# Altium PCB DebugSwitch.PcbDoc
Units mm, origin at the board's own origin, x right, y up, seen from the top; angles counter-clockwise.
Board outline 100 x 50 mm, 2 copper layers (Top Layer, Bottom Layer), stack 1.571 mm thick; 25 components, 37 nets, 149 pads, 345 vias.
Unrouted connection lines stored in the file: 12.
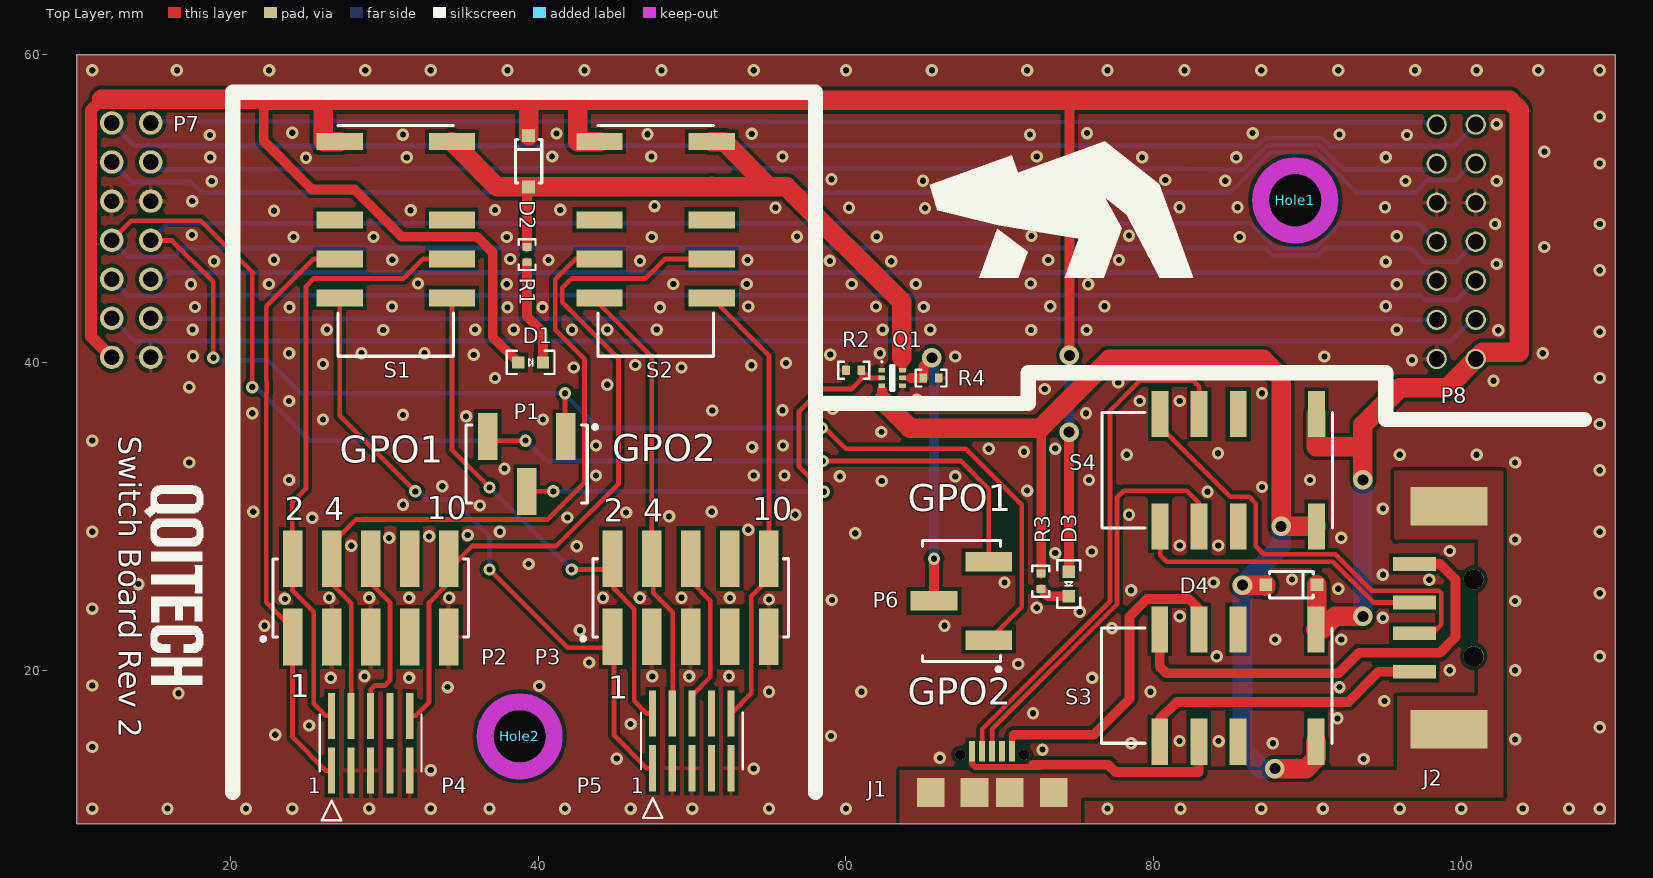
[diagram p0: Top Layer view]
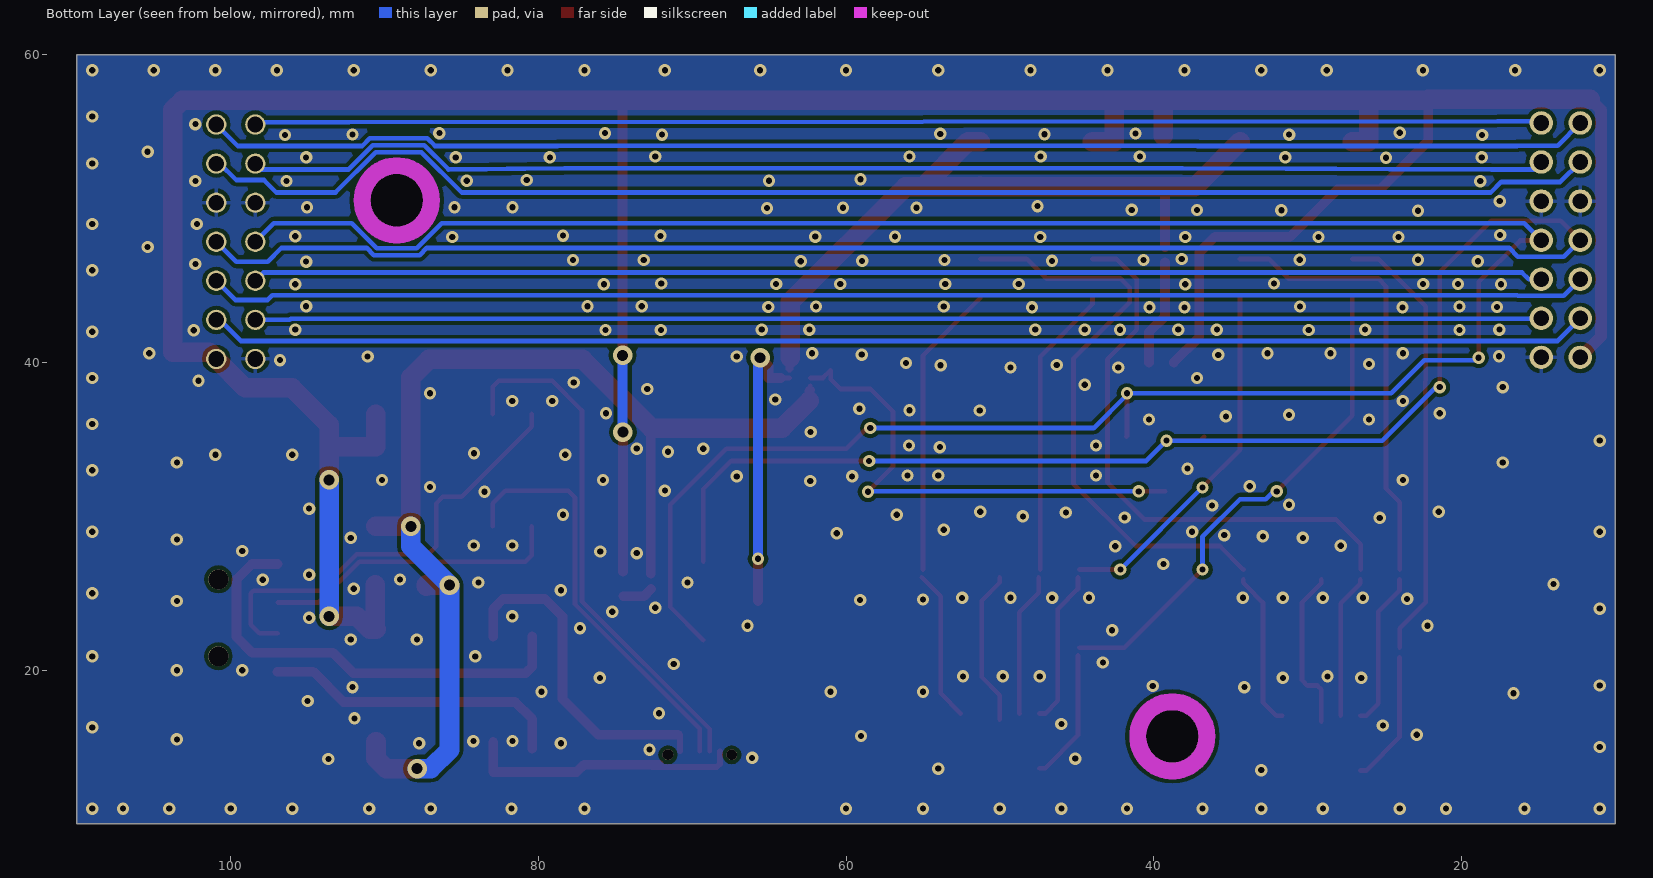
[diagram p1: Bottom Layer view, seen from below]
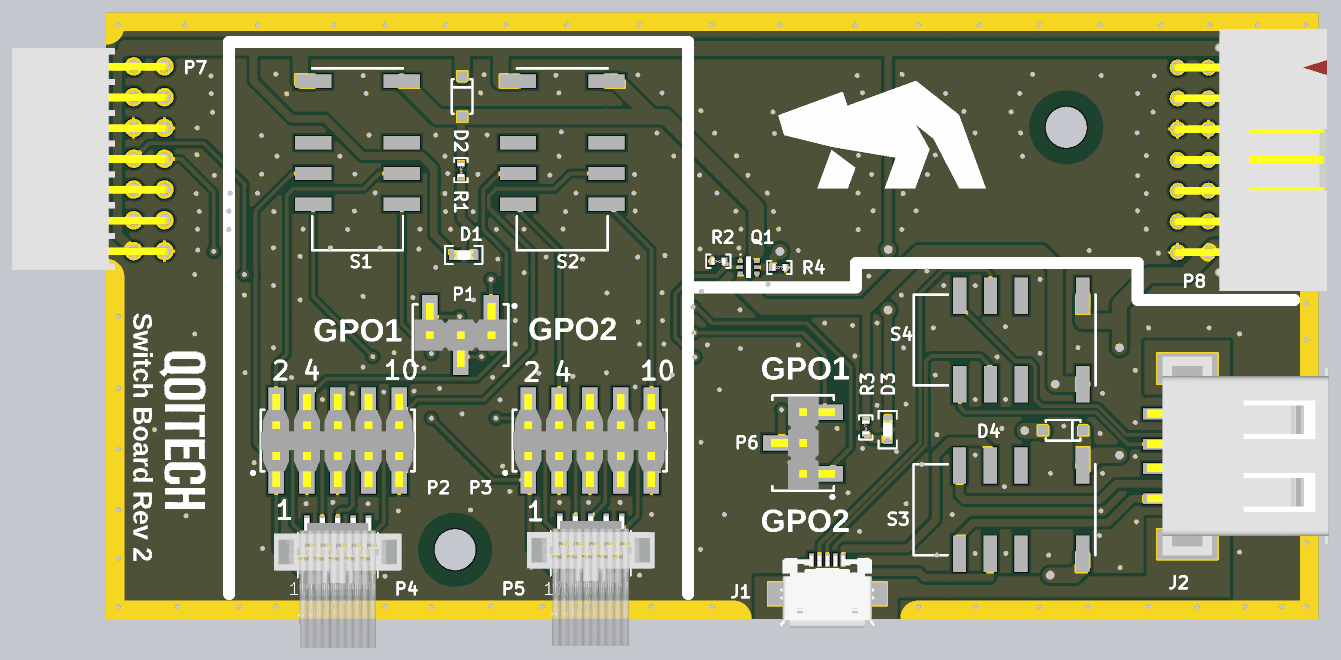
[diagram p2: 3D render of the assembled board from above, using the file's embedded part models]

## Layer stack, top to bottom
Top Solder: solder mask 0.0102, Solder Resist, Dk 3.5
Top Layer: signal copper 0.0356
Dielectric 1: dielectric 1.5, FR-4, Dk 4.8
Bottom Layer: signal copper 0.0356
Bottom Solder: solder mask 0.0102, Solder Resist, Dk 3.5

## Board outline
10,10 110,10 110,60 10,60

## Design rules (kind name [scope] priority, off if disabled: settings)
Clearance Clearance_2 [InNamedPolygon('Top Layer-USB_shield') vs InNet('USB_shield')] p1: gap=0 ignorepadtopadclearanceinfootprint=FALSE
Clearance Clearance_1 [InPolygon] p2: gap=0.254 ignorepadtopadclearanceinfootprint=FALSE except(0: Arc-Hole Track-Hole SMDPad-Hole THPad-Hole Via-Hole Fill-Hole Poly-Hole Region-Hole Text-Hole)
Clearance [All] p3: gap=0.152 ignorepadtopadclearanceinfootprint=FALSE except(0: Arc-Hole Track-Hole SMDPad-Hole THPad-Hole Via-Hole Fill-Hole Poly-Hole Region-Hole Text-Hole)
HoleSize [All] p1: absolutevalues=TRUE maxlimit=5.08 minlimit=0.025 maxpercent=80.000 minpercent=20.000
PolygonConnect PolygonConnect_1 [All vs IsNamedPolygon('Top Layer-USB_shield')] p1: connectstyle=Direct reliefconductorwidth=0.254 reliefentries=4 polygonreliefangle="90 Angle" airgapwidth=0.254
PolygonConnect [All] p2: thpad.connectstyle=Relief thpad.reliefconductorwidth=0.254 thpad.reliefentries=4 thpad.polygonreliefangle="90 Angle" thpad.airgapwidth=0.254 smdpad.connectstyle=Relief smdpad.reliefconductorwidth=0.254 smdpad.reliefentries=4 smdpad.polygonreliefangle="90 Angle" smdpad.airgapwidth=0.254 via.connectstyle=Direct via.reliefconductorwidth=0.254 via.reliefentries=4 via.polygonreliefangle="90 Angle" via.airgapwidth=0.254
RoutingVias [All] p1: holewidth=0.711 width=1.27 viastyle="Through Hole" minholewidth=0.3 minwidth=0.605 maxholewidth=0.711 maxwidth=1.27
SolderMaskExpansion [All] p1: expansion=0.102
Width [All] p1: maxlimit=1.27 minlimit=0.152 preferedwidth=0.305 minimp=50.000000 maximp=50.000000 favimp=50.000000
29 further rules are at their usual default settings.

## Components (designator, comment, footprint, x,y, rotation, side; value= is the part's Value field where it differs from the comment)
D1 "LED_GREEN" LED_0603 39.497,40.005 r180 top
D2 "Diode" SOD-123 39.37,53.086 r90 top
D3 "LED_GREEN" LED_0603 74.475,25.605 r90 top
D4 "Diode" SOD-123 88.951,25.552 r0 top
Hole1 "M3x0.5" M3x0.5 89.205,50.546 r0 top
Hole2 "M3x0.5" M3x0.5 38.786,15.697 r0 top
J1 "USB" USB_microB 69.5,13 r0 top
J2 "USB_A" USB-A-S-F-W-SM2 99.2,23.4 r90 top
P1 "3x1pin header" TSM-103-01-T-SV 39.243,33.401 r180 top
P2 "5x2pin header" TSM-105-01-L-DV 29.1,24.7 r0 top
P3 "5x2pin header" TSM-105-01-L-DV 49.9,24.705 r0 top
P4 "5x2pin header" FTSH-105-01-F-DV 29.1,15.25 r0 top
P5 "5x2pin header" FTSH-105-01-F-DV 49.975,15.4 r0 top
P6 "3x1pin header" TSM-103-01-T-SV 67.5,24.5 r90 top
P7 "7x2pin header" SSQ-107-02-T-D-RA 13.538,47.955 r270 top
P8 "7x2pin header" TSS-107-04-L-D-RA 99.67,47.854 r90 top
Q1 "NTZD3154NT1G" SOT-563-6 63,39 r0 top
R1 "RES_0402" RES_0402 39.268,47.015 r90 top value=10k
R2 "RES_0402" RES_0402 60.5,39.5 r0 top value=10k
R3 "RES_0402" RES_0402 72.669,25.781 r90 top value=10k
R4 "RES_0402" RES_0402 65.532,38.989 r180 top value=10k
S1 "Relay_DPDT" EE2-5NU 30.734,49.276 r270 top
S2 "Relay_DPDT" EE2-5NU 47.625,49.276 r270 top
S3 "Relay_DPDT" EE2-5NU 85.475,19 r180 top
S4 "Relay_DPDT" EE2-5NU 85.5,33 r180 top

## Footprints (in the part's own frame and the unit in brackets; to place one, negate y for a bottom-side part, rotate by r counter-clockwise, add the part's x,y. Pads: shape width x height; smd on the part's side, far side on the other; paste and mask are expansions set on the pad)
EE2-5NU [mm] "RELAY GEN PURPOSE DPDT 2A 5V"
  rect 1.1x3 smd: 1(-5.08,-3.65) 2(0,-3.65) 3(2.54,-3.65) 4(5.08,-3.65) 5(5.08,3.65) 6(2.54,3.65) 7(0,3.65) 8(-5.08,3.65)
  silkscreen extent -6.13,-3.75 8.87,3.75, body extent -6.25,-3.75 9,3.75, height 10
FTSH-105-01-F-DV [mil]
  rect 18x118 smd: 1(-100,-70) 2(-100,70) 3(-50,-70) 4(-50,70) 5(0,-70) 6(0,70) 7(50,-70) 8(50,70) 9(100,-70) 10(100,70)
  silkscreen extent -130,-197 130,72, body extent -207,-300 208,120, height 315
LED_0603 [mm] "LED GREEN CLEAR 0603 SMD"
  rect 0.8x0.8 smd: 1(-0.8,0) 2(0.8,0)
  silkscreen extent -1.55,-0.75 1.55,0.75, body extent -0.8,-0.4 0.8,0.4, height 0.7
M3x0.5 [mm] "M3 screw hole"
  round 3.4 hole 3.4 unplated paste+0 mask+0.102: M3(0,0)
  Keep-Out Layer circle w1.1: c0,0 r2.25
RES_0402 [mm] "Chip resistor"
  rrect15% 0.5x0.6 smd: 1(-0.5,0) 2(0.5,0)
  silkscreen extent -1,-0.55 1,0.55, body extent -0.57,-0.27 0.58,0.28, height 0.41
SOD-123 [mil]
  rect 33x33 smd: 1(65.5,0) 2(-65.5,0)
  silkscreen extent -56,-33 56,33
SOT-563-6 [mm] "SOT23, 6-Leads, Body 1.6x1.2mm, Pitch 0.5mm"
  rect 0.45x0.3 smd: 1(-0.675,0.5) 2(-0.675,0) 3(-0.675,-0.5) 4(0.675,-0.5) 5(0.675,0) 6(0.675,0.5)
  silkscreen extent -0.72,-0.8 0.1,1.1, body extent -0.6,-0.8 0.6,0.8, height 0.6
SSQ-107-02-T-D-RA [mil] "CONN RCPT .100\" 14POS DL R/A TIN"
  round 60 hole 40: 1(300,-50) 2(300,50) 3(200,-50) 4(200,50) 5(100,-50) 6(100,50) 7(0,-50) 8(0,50) 9(-100,-50) 10(-100,50) 11(-200,-50) 12(-200,50) 13(-300,-50) 14(-300,50)
  body extent -359,-446 361,61, height 198
TSM-103-01-T-SV [mil] "CONN HEADER 3POS .100\" SNGL SMD"
  rect 50x120 smd: 1(-100,-70) 2(0,70) 3(100,-70)
  silkscreen extent -180,-100 155,100, body extent -150,-104 150,104, height 380
TSM-105-01-L-DV [mil] "CONN HEADER 10POS .100\" DBL SMD"
  rect 50x145 smd: 1(-200,-100) 2(-200,100) 3(-100,-100) 4(-100,100) 5(0,-100) 6(0,100) 7(100,-100) 8(100,100) 9(200,-100) 10(200,100)
  silkscreen extent -280,-110 250,100, body extent -250,-151 250,152, height 380
TSS-107-04-L-D-RA [mil] "LOW PROFILE .025 SQ STRIPS"
  round 52 hole 40: 1(-300,-50) 2(-300,50) 3(-200,-50) 4(-200,50) 5(-100,-50) 6(-100,50) 7(0,-50) 8(0,50) 9(100,-50) 10(100,50) 11(200,-50) 12(200,50) 13(300,-50) 14(300,50)
  body extent -425,-435 425,63, height 375
USB-A-S-F-W-SM2 [mm] "USB A"
  rect 0.9x2.8 smd: 1(-3.5,2.25) 2(-1,2.25) 3(1,2.25) 4(3.5,2.25)
  round 1.3 hole 1.3 unplated: H1(-2.5,-1.6) H2(2.5,-1.6)
  rect 2.5x5 smd: Z1(-7.25,0) Z2(7.25,0)
  body extent -8.17,-11.65 8.23,3.35, height 7.77
USB_microB [mm] "CONN RCPT USB MICRO B R/A SMT"
  rect 0.4x1.35 smd: 1(-1.3,1.725) 2(-0.65,1.725) 3(0,1.725) 4(0.65,1.725) 5(1.3,1.725)
  round 0.7 hole 0.7 unplated: H1(-2.075,1.5) H2(2.075,1.5)
  rect 1.8x1.9 smd: Z1(-4,-0.95) Z2(-1.15,-0.95) Z3(1.15,-0.95) Z4(4,-0.95)
  body extent -4,-3.7 4,2.2, height 2.66

## Part data
D1 D3: Supplier Part Number 1=732-4971-1-ND, Supplier 1=DigiKey
D2 D4: "Generic diode", Supplier Part Number 1=1N4148W-E3-08CT-ND, ComponentLink1Description="Manufacturer Link", ComponentLink1URL=http://www.infineon.com/, ComponentLink2Description=Datasheet, ComponentLink2URL=http://www.infineon.com/upload/Document/cmc_upload/documents/080/120/ba592_ba892series_1.pdf, Supplier 1=DigiKey
J1: Supplier Part Number 1=732-3155-1-ND, ComponentLink1 Description=Manufacturer, ComponentLink1URL=http://www.we-online.de, ComponentLink2 Description=Datasheet, ComponentLink2URL=http://katalog.we-online.de/em/datasheet/65100516121.pdf, Supplier 1=DigiKey
J2: Supplier Part Number 1=SAM10368-ND, ComponentLink1 Description=Manufacturer, ComponentLink1URL=http://www.we-online.de, ComponentLink2 Description=Datasheet, ComponentLink2URL=http://katalog.we-online.de/em/datasheet/65100516121.pdf, Supplier 1=DigiKey
P1 P6: Manufacturer=Samtec, PartNumber=TSM-103-01-T-SV, Supplier Part Number 1=SAM10791-ND, Mounting Technology="Surface Mount", Pitch="2.54 mm", Supplier 1=DigiKey
P2 P3: Manufacturer=Samtec, PartNumber=TSM-105-01-L-DV, Supplier Part Number 1=SAM8984-ND, Mounting Technology="Surface Mount", Pitch="2.54 mm", Supplier 1=DigiKey
P4 P5: Manufacturer=Samtec, PartNumber=TSM-105-01-L-DV, Supplier Part Number 1=SAM8796-ND, Mounting Technology="Surface Mount", Pitch="2.54 mm", Supplier 1=DigiKey
P7: Manufacturer=Samtec, PartNumber=HTSS-107-01-L-DV, Supplier Part Number 1=SAM1224-07-ND, Mounting Technology="Surface Mount", Pitch="2.54 mm", Supplier 1=DigiKey
P8: Manufacturer=Samtec, PartNumber=HTSS-107-01-L-DV, Supplier Part Number 1=SAM10311-ND, Mounting Technology="Surface Mount", Pitch="2.54 mm", Supplier 1=DigiKey
Q1: "Small Signal MOSFET, 20 V, 540 mA, Dual N-Channel, 6-Pin SOT-563, Pb-Free, Tape and Reel", Manufacturer="On Semiconductor", Package Type=SOT-563, Supplier Part Number 1=NTZD3154NT1GOSCT-ND, Channel Polarity="N Channel", Ciss Typ (pF)=80, ComponentLink1Description="Manufacturer URL", ComponentLink1URL=http://www.onsemi.com/, ComponentLink2Description=Datasheet, ComponentLink2URL=http://www.onsemi.com/pub_link/Collateral/NTZD3154N-D.PDF, ComponentLink3Description="Package Specification", ComponentLink3URL=http://www.onsemi.cn/pub_link/Collateral/463A-01.PDF, Configuration=Dual, Coss Typ (pF)=13, Crss Typ (pF)=10, DatasheetVersion="Rev. 2", ID Max (A)=0.54, Mounting Technology="Surface Mount", PackageDescription="6-Pin Small Outline Transistor, Body 1.6 x 1.2 mm, Pitch 0.5 mm", PackageReference=SOT-563-6-463A-01, PackageVersion="Rev. F, 04/2005", Packing="Tape and Reel", PartNumber=NTZD3154NT1G, RoHS=Pb-Free, Supplier 1=DigiKey, V(BR)DSS Min (V)=20, VGS(th) Max (V)=1, VGS Max (V)=6
R1 R3: "SMD Chip Resistor 0402", Package=0402, Supplier Part Number 1=P100LCT-ND, Component Class=A, PartDescription="Chip resistor", SIGN=HL, Supplier 1=DigiKey
R2 R4: "SMD Chip Resistor 0402", Package=0402, Supplier Part Number 1=P10.0KLCT-ND, Component Class=A, PartDescription="Chip resistor", SIGN=HL, Supplier 1=DigiKey
S1 S2 S3 S4: "Relay DPDT", Supplier Part Number 1=399-11056-5-ND, Supplier 1=DigiKey

## Via types
v1: diameter 0.8, hole 0.4, Top Layer to Bottom Layer, tented both sides, 337 vias
v2: diameter 1.27, hole 0.711, Top Layer to Bottom Layer, tented both sides, 8 vias

## Nets (pads, with @x,y where several pads share a name; then routed paths per layer and width w, separated by ;. In a path a pad name is that pad's centre, name@x,y a point inside that pad or via, vN(x,y) a via of type N, cw(c..) or ccw(c..) an arc to the next point about the centre after c; other vN are vias at no path point)
+5: D1.2 D2.1 D3.2 D4.1 P7.1 P8.1 S1.1 S2.1 S3.1 S4.1 | length 231.3
  Top Layer w0.635: 22.149,57.125 22.149,54.407 25.298,51.257 28.042,51.257 31.115,48.184 36.017,48.184 37.033,47.168 37.033,41.669 D1.2 ; 74.473,57.048 74.524,56.998 v2(74.524,40.462) ; D3.2@74.5,26.405 v2(74.5,35.482) v2@74.5,35.609
  Top Layer w0.762: 11.626,57.125 10.922,56.42 10.922,41.681 P7.1
  Top Layer w1.27: 11.626,57.125 22.149,57.125 ; 22.149,57.048 26.01,57.048 ; S1.1 26.051,54.356 26.01,54.397 26.01,57.048 ; D2.1 39.37,57.048 ; S2.1 42.551,54.356 42.551,56.998 42.5,57.048 ; S4.1 90.58,34.535 93.534,34.535 93.599,34.6 ; D4.1 90.614,22.71 S3.1 90.951,22.65 91.796,23.495 v2(93.599,23.495) ; v2(93.599,32.369) 93.599,34.6 ; 26.01,57.048 39.37,57.048 ; 39.37,57.048 42.5,57.048 ; 42.5,57.048 103.149,57.048 103.759,56.439 103.759,40.675 101.381,40.675 P8.1 99.06,38.354 96.012,38.354 93.599,35.941 93.599,34.6
  Bottom Layer w0.635: v2(74.5,35.482) 74.524,35.506 v2(74.524,40.462)
  Bottom Layer w1.27: v2(93.599,23.495) v2(93.599,32.369)
GND: P2.3 P2.5 P2.9 P3.3 P3.5 P3.9 P4.3 P4.5 P4.9 P5.3 P5.5 P5.9 P7.2 P7.9 P7.10 P8.2 P8.9 P8.10 Q1.1 Q1.4 R2.1 R4.1
  other v1: 11,11 15.89,11 21,11 24,11 29,11 33,11 36.83,11 41.732,11 46,11 50,11 55,11 60,11 77,11 81.75,11 87,11 91,11 96,11 100,11 104,11 107,11 109,11 33,13.5 54,13.6 93.65,14.224 45.1,14.25 66.1,14.3 72.771,14.834 11,15 78.537,15.25 87.75,15.25 81.686,15.392 84.226,15.388 103.5,15.5 59.03,15.723 22.9,15.8 109,16.281 25.1,16.4 46,16.5 91.954,16.866 72.155,17.203 95,18 16.6,18.5 55,18.6 61,18.6 79.8,18.6 34.1,18.9 92.089,18.898 40.056,18.974 11,19 26.5,19.5 31.6,19.5 76,19.5 28.7,19.6 47.4,19.6 49.8,19.6 52.4,19.6 99.25,20 103.5,20 71.2,20.4 43.3,20.5 84.1,20.9 109,20.9 87.9,22 92.2,22 42.7,22.6 77.292,22.733 22.2,22.885 66.4,22.885 94.9,23.4 81.7,23.5 75.2,23.8 11,24 72.4,24.055 103.5,24.5 59.08,24.562 55,24.6 23.52,24.638 29,24.7 31.6,24.7 46.6,24.7 52.451,24.7 26.4,24.705 34.2,24.705 44.2,24.705 49.3,24.705 109,25 78.537,25.197 92,25.295 14,25.596 70.3,25.7 83.9,25.7 97.917,25.883 89,25.9 94.9,26.2 39.37,26.9 73.6,27.61 75.971,27.711 99.25,27.75 42.5,28.056 27.838,28.092 81.7,28.1 84.201,28.1 103.5,28.5 30.3,28.6 92.2,28.6 32.9,28.7 35.408,28.778 60.6,28.9 11,29 37.5,29 109,29 53.645,29.132 25.3,29.9 41.885,29.921 48.5,30 56.7,30.1 78.4,30.1 45.709,30.25 21.463,30.3 51.275,30.3 94.9,30.5 36.2,30.7 31.2,30.753 83.5,31.598 71.775,31.674 87.046,31.902 33.75,31.953 62.325,32.3 23.8,32.36 75.794,32.36 90.166,32.369 59.6,32.6 67.1,32.6 43.75,32.654 54,32.654 56,32.654 109,33 37.8,33.1 17.3,33.5 103.5,33.5 78.25,34 96,34 101,34 84.188,34.1 71.575,34.2 69.278,34.392 73.6,34.4 53.9,34.5 43.75,34.6 55.9,34.6 11,34.925 62.3,35.482 109,36 26,36.3 40.3,36.3 35.305,36.5 31.2,36.6 21.4,36.7 75.6,36.7 51.308,36.882 55.869,36.9 59.13,37 23.8,37.5 79.1,37.5 81.7,37.5 64.6,37.6 87.046,37.998 72.922,38.278 17.3,38.4 44.475,38.557 77.7,38.7 102.1,38.811 37.185,38.989 109,39 42.3,39.676 49.3,39.672 46.3,39.835 53.848,39.828 26,39.9 56.1,39.973 96.8,40.157 67.1,40.386 91.1,40.386 17.551,40.411 35.8,40.5 58.979,40.513 23.8,40.6 28.5,40.6 32.6,40.6 62.2,40.6 105.3,40.6 109,42 102.4,42.1 20.117,42.113 29.921,42.113 72.034,42.113 75.641,42.113 17.526,42.139 26.25,42.139 35.89,42.139 38.405,42.139 42.189,42.131 44.475,42.139 47.701,42.139 62.382,42.139 65.481,42.139 95.809,42.139 23.825,43.586 38,43.586 40.267,43.586 47.904,43.586 17.678,43.612 65.049,43.612 20.117,43.637 30.48,43.637 53.645,43.637 61.951,43.637 73.279,43.663 76.81,43.663 95.098,43.663 17.424,45.085 37.948,45.085 75.743,45.085 95.809,45.085 20.218,45.11 22.479,45.11 48.768,45.11 53.543,45.11 60.376,45.11 64.541,45.11 32.182,45.136 72.009,45.136 109,46 102.3,46.4 95.098,46.558 18.923,46.584 62.941,46.584 46.609,46.609 58.953,46.609 40.665,46.66 53.594,46.66 73.152,46.66 77.75,46.66 22.815,46.685 30.505,46.685 38.176,46.736 105.4,47.515 24.079,48.158 29.286,48.158 37.948,48.158 47.371,48.158 85.598,48.158 56.82,48.184 62.001,48.184 95.809,48.209 72.06,48.235 78.4,48.25 17.475,48.285 102.2,49 109,49 22.815,49.867 31.699,49.895 37.185,49.913 41.427,49.926 65.134,50.038 55.423,50.063 60.198,50.063 81.686,50.094 85.446,50.094 95.047,50.094 47.549,50.165 17.5,50.49 18.771,51.791 96.368,51.8 102.3,51.8 65,51.816 84.658,51.816 80.75,51.867 59.055,51.918 109,52.934 24.892,53.315 18.669,53.34 31.445,53.34 79.25,53.34 85.369,53.34 95.098,53.34 40.894,53.391 47.346,53.391 55.869,53.391 72.4,53.395 105.4,53.7 18.644,54.788 96.469,54.788 31.191,54.813 71.958,54.813 92.089,54.821 47.092,54.839 53.873,54.864 41.173,54.889 75.667,54.915 86.436,54.915 24,54.94 102.3,55.5 109,56 11,59 16.5,59 22.5,59 28.75,59 33,59 38,59 43,59 48,59 54,59 60,59 65.583,59 71.775,59 77,59 82,59 87,59 92,59 97,59 101,59 105,59 109,59
NetD1_1: D1.1 R1.1 | length 6.9
  Top Layer w0.635: R1.1 39.268,43.002 40.297,41.974 D1.1
NetD2_2: D2.2 Q1.6 R1.2 S1.8 S2.8 | length 46.8
  Top Layer w0.508: Q1.6@63.675,39.62 63.675,40.259
  Top Layer w0.635: R1.2 39.268,51.321 D2.2 ; 63.627,40.307 63.675,40.259
  Top Layer w1.27: S1.8 37.318,51.422 D2.2 51.245,51.422 ; 51.275,51.452 51.245,51.422 ; S2.8 52.066,54.356 55,51.422 ; 63.627,40.307 63.627,43.942 56.147,51.422 55,51.422 ; 51.245,51.422 55,51.422
NetD3_1: D3.1 R3.1 | length 2
  Top Layer w0.635: R3.1 73.145,24.805 D3.1
NetD4_2: D4.2 Q1.3 R3.2 S3.8 S4.8 | length 75.1
  Top Layer w0.305: 62.325,38.202 Q1.3
  Top Layer w0.635: 62.325,38.202 62.382,38.144 62.382,37.516 ; R3.2@72.695,26.281 72.695,35.738
  Top Layer w1.27: 62.382,37.516 64.16,35.738 72.644,35.738 77.114,40.208 87.122,40.208 88.29,39.04 v2(88.29,29.35) S4.8 ; v2(85.776,25.527) D4.2@87.109,25.527 ; D4.2@87.287,25.456 D4.2 ; v2(87.878,13.6) 89.893,13.6 90.555,14.262 S3.8
  Bottom Layer w1.27: v2(87.878,13.6) 87,13.6 85.776,14.824 v2(85.776,25.527) 88.29,28.042 v2(88.29,29.35)
NetJ1_1: J1.1 S3.6 | length 18.3
  Top Layer w0.381: J1.1 68.2,13.907 68.4,13.707 72.65,13.707
  Top Layer w0.635: 72.155,13.85 77.05,13.85 77.52,13.38 82.935,13.38 S3.6
NetJ1_2: J1.2 S4.3 | length 34.1
  Top Layer w0.305: J1.2 68.85,16.177 77.165,24.492 77.165,36.881 79.096,38.811 82.575,38.811 82.96,38.427 S4.3
NetJ1_3: J1.3 S4.6 | length 27.2
  Top Layer w0.305: J1.3 69.5,16.18 77.622,24.303 77.622,31.242 78.054,31.674 82.144,31.674 82.96,30.857 S4.6
NetJ1_5: J1.5 S3.3 | length 22
  Top Layer w0.305: 70.8,15.7 70.9,15.8
  Top Layer w0.381: J1.5 70.8,15.7
  Top Layer w0.635: 70.9,15.8 76.1,15.8 78.435,18.136 78.435,23.495 79.56,24.62 82.289,24.62 82.931,23.978 S3.3@82.931,22.192
NetJ2_1: J2.1 S3.5 | length 19.8
  Top Layer w0.635: S3.5@80.391,14.892 80.391,16.815 81.509,17.932 92.659,17.932 94.627,19.9 J2.1
NetJ2_2: J2.2 S4.4 | length 29.2
  Top Layer w0.305: S4.4 80.42,35.836 84.988,31.267 86.208,31.267 86.639,30.836 86.639,28.053 87.147,27.545 91.796,27.545 94.169,25.171 98.527,25.171 98.704,24.994 98.704,22.962 98.143,22.4 J2.2
NetJ2_3: J2.3 S4.5 | length 19.7
  Top Layer w0.305: S4.5 80.42,27.479 80.848,27.051 91.643,27.051 94.294,24.4 J2.3
NetJ2_4: J2.4 S3.4 | length 29.2
  Top Layer w0.635: S3.4@80.391,22.192 80.391,20.244 80.835,19.8 92.012,19.8 93.345,21.133 98.603,21.133 99.619,22.149 99.619,25.908 98.627,26.9 J2.4
NetP1_1: P1.1 P6.1 P7.8 P8.8 | length 165.4
  Top Layer w0.305: P7.8 14.834,47.93 16.18,47.93 18.872,45.237 v1(18.872,40.31) ; v1(41.732,37.998) 41.732,35.23 P1.1 ; v1(58.42,35.738) 58.42,35.966 59.995,34.392 67.779,34.392 71.425,30.746 71.425,24.107 P6.1
  Bottom Layer w0.305: P7.8 15.911,49.058 86.28,49.058 87.913,47.426 90.497,47.426 92.129,49.058 97.195,49.058 P8.8 ; v1(18.872,40.31) 19.025,40.157 22.403,40.157 24.562,37.998 v1(41.732,37.998) 41.732,37.897 43.891,35.738 v1(58.42,35.738)
NetP1_2: P1.2 Q1.2 R2.2 | length 32.3
  Top Layer w0.305: P1.2 v1(40.97,31.623) ; v1(58.572,31.598) 56.947,33.223 56.947,36.83 58.395,38.278 60.35,38.278 61,38.927 R2.2 61.5,39 Q1.2
  Bottom Layer w0.305: v1(40.97,31.623) 58.572,31.623 v1(58.572,31.598)
NetP1_3: P1.3 P6.3 P7.7 P8.7 | length 167.2
  Top Layer w0.305: P7.7 13.538,49.225 18.059,49.225 21.463,45.822 21.4,45.759 v1(21.4,38.4) ; P1.3 36.957,34.925 v1(39.167,34.925) ; v1(58.496,33.604) 67.453,33.604 69.278,31.779 P6.3
  Bottom Layer w0.305: P7.7 13.34,46.883 16.332,46.883 16.896,47.447 87.245,47.447 87.723,46.969 90.687,46.969 91.165,47.447 96.698,47.447 97.587,46.558 99.644,46.558 P8.7 ; v1(21.4,38.4) 21.658,38.4 25.133,34.925 v1(39.167,34.925) 40.488,33.604 v1(58.496,33.604)
NetP2_1: P2.1 P4.1 S1.3 | length 37.6
  Top Layer w0.305: P2.1@24.003,21.463 24.003,22.733 22.319,24.417 22.319,37.99 22.34,38.011 22.34,38.789 22.319,38.81 22.319,43.655 25.4,46.736 S1.3 ; P2.1@24.023,20.833 24.023,15.635 26.186,13.472 P4.1
NetP2_2: P2.2 P4.2 S1.6 | length 39.2
  Top Layer w0.305: P2.2@24.003,26.543 24.003,30.924 24.9,31.822 24.9,44.966 25.4,45.466 31.242,45.466 32.512,46.736 S1.6 ; P2.2@24.023,25.913 24.023,25.166 25.4,23.789 25.4,17.814 26.186,17.028 P4.2
NetP2_4: P2.4 P4.4 S2.3 | length 46.6
  Top Layer w0.305: P2.4@26.543,26.543 26.543,28.194 28.149,29.8 38.476,29.8 38.482,29.794 40.589,29.794 43.005,32.21 43.005,40.224 41.097,42.131 41.097,45.415 42.418,46.736 S2.3 ; P2.4@26.563,25.913 26.563,25.609 27.833,24.339 27.833,17.031 P4.4
NetP2_6: P2.6 P4.6 | length 10.7
  Top Layer w0.305: P4.6@29.103,16.651 29.103,18.753 29.35,19 30,19 30.353,19.353 30.353,24.409 29.103,25.659 P2.6@29.103,25.913
NetP2_10: P2.10 P4.10 S2.6 | length 48.3
  Top Layer w0.305: P4.10 32.02,17.028 32.893,17.901 32.893,24.395 33.908,25.41 33.919,25.41 34.183,25.674 P2.10@34.183,25.913 ; P2.10@34.163,26.543 35.687,28.067 41.148,28.067 45.212,32.131 45.212,40.259 41.554,43.917 41.554,44.856 42.164,45.466 46.99,45.466 48.26,46.736 S2.6
NetP3_1: P3.1 P5.1 S1.4 | length 41.5
  Top Layer w0.305: S1.4 27.084,36.543 v1(32,31.627) ; v1(36.83,26.543) 41.91,21.463 P3.1@44.831,21.463 ; P3.1@44.92,20.96 44.92,15.762 47.06,13.622 P5.1
  Bottom Layer w0.305: v1(32,31.627) 32.198,31.627 32.708,31.117 34.387,31.117 36.83,28.673 v1(36.83,26.543)
NetP3_2: P3.2 P5.2 S1.5 | length 33.7
  Top Layer w0.305: S1.5 34.384,34.323 v1(36.83,31.877) ; v1(42.164,26.543) P3.2@44.831,26.543 ; P3.2@44.92,26.04 44.92,25.282 46.228,23.974 46.228,18.01 47.06,17.178 P5.2
  Bottom Layer w0.305: v1(36.83,31.877) v1(42.164,26.543)
NetP3_4: P3.4 P5.4 S2.4 | length 28.5
  Top Layer w0.305: S2.4 43.975,43.782 47.371,40.386 P3.4@47.371,26.543 ; P3.4@47.46,26.04 47.46,25.04 48.73,23.77 48.73,17.203 P5.4
NetP3_6: P3.6 P5.6 | length 10.2
  Top Layer w0.305: P5.6@50,16.778 50,18.375 51.181,19.556 51.181,24.519 50,25.7 P3.6@50,26.04
NetP3_10: P3.10 P5.10 S2.5 | length 29.1
  Top Layer w0.305: S2.5 54.991,40.48 P3.10@54.991,26.543 ; P5.10@52.54,17.178 53.848,18.486 53.848,24.808 P3.10@55.08,26.04
NetP6_2: P6.2 Q1.5 R4.2 | length 18.5
  Top Layer w0.305: Q1.5 64,39
  Top Layer w0.635: 64.226,38.989 R4.2 65.032,39.759 v2(65.583,40.31) ; P6.2 v1(65.722,27.245)
  Bottom Layer w0.635: v2(65.583,40.31) 65.722,40.171 v1(65.722,27.245)
NetP7_3: P7.3 P8.3 | length 89.8
  Bottom Layer w0.305: P7.3 13.741,41.402 99.339,41.402 100.711,42.774 P8.3
NetP7_4: P7.4 P8.4 | length 83.6
  Bottom Layer w0.305: P7.4 14.84,42.843 17.755,42.843 96.101,42.843 96.171,42.774 P8.4
NetP7_5: P7.5 P8.5 | length 89.9
  Bottom Layer w0.305: P7.5 13.335,44.348 16.337,44.348 16.356,44.367 97.288,44.367 97.587,44.069 99.695,44.069 P8.5 P8.5@100.813,45.314
NetP7_6: P7.6 P8.6 | length 84.1
  Bottom Layer w0.305: P7.6 15.621,45.415 16.053,45.847 97.866,45.847 P8.6 P8.6@98.298,45.212
NetP7_11: P7.11 P8.11 | length 92.4
  Bottom Layer w0.305: P7.11 13.564,51.74 17.399,51.74 18.085,51.054 37.625,51.054 76.707,51.054 84.988,51.054 87.6,53.666 90.581,53.666 93.193,51.054 97.028,51.054 97.841,51.867 99.644,51.867 100.711,52.934 P8.11
NetP7_12: P7.12 P8.12 | length 85.3
  Bottom Layer w0.305: P7.12 15.291,52.553 18.034,52.553 38.125,52.629 78.308,52.629 85.84,52.553 87.411,54.123 90.77,54.123 92.341,52.553 P8.12@98.577,52.553
NetP7_13: P7.13 P8.13 | length 90.6
  Bottom Layer w0.305: P7.13 13.741,54.102 16.327,54.102 16.352,54.077 37.15,54.077 37.175,54.102 78.72,54.102 78.745,54.077 86.718,54.077 87.221,54.58 90.96,54.58 91.463,54.077 99.543,54.077 P8.13 P8.13@100.66,55.474
NetP7_14: P7.14 P8.14 | length 83.7
  Bottom Layer w0.305: P7.14 14.928,55.695 17.653,55.695 92.304,55.626 98.247,55.626 P8.14
USB_shield: J1.Z1 J1.Z2 J1.Z3 J1.Z4 J2.Z1 J2.Z2
pads on no net: Hole1.M3 Hole2.M3 J1.4 J1.H1 J1.H2 J2.H1 J2.H2 P2.7 P2.8 P3.7 P3.8 P4.7 P4.8 P5.7 P5.8 S1.2 S1.7 S2.2 S2.7 S3.2 S3.7 S4.2 S4.7

## Polygon pours and split planes (outlines as drawn)
GND on Top Layer "Top Layer-GND" (solid, remove dead copper, pour order 4): 10,60 110,60 110,10 10,10
USB_shield on Top Layer "Top Layer-USB_shield" (solid, remove dead copper, pour order 2): 75.275,13.525 75.25,13.5 63.5,13.5 63.5,10 63.475,9.975 75.275,9.975 75.275,11.625 75.4,11.75 102.725,11.75 102.725,33 102.675,32.95 95.65,32.95 95.65,28.575 95.775,28.45 95.825,28.5 101.1,28.5 101.1,18.425 100.975,18.3 95.825,18.3 95.825,13.55 95.775,13.5 75.25,13.5
no net on Top Overlay "BEAR1" (solid): 80.359,51.585 76.81,54.391 71.159,52.329 70.768,53.49 65.444,51.546 65.927,49.902 69.907,48.923 75.139,48.036 74.226,45.504 76.744,45.504 77.932,48.727 76.81,50.75 78.245,49.615 80.385,45.504 82.577,45.504
no net on Top Overlay "BEAR2" (solid): 68.667,45.504 71.186,45.504 71.825,47.201 69.842,48.688
GND on Bottom Layer "Bottom Layer-No Net" (solid, remove dead copper, pour order 8): 10,60 110,60 110,10 10,10

## Silkscreen, mask and mechanical layers (free items; w line width, h text height)
Top Overlay:
  drawing of 19 lines, arcs and shapes, not listed
  text "Switch Board Rev 2" at 12.25,35.25 h2.5 r270
  text "GPO2" at 44.82,33 h3
  text "GPO1" at 27.084,32.893 h3
  text "10" at 32.75,29.8 h1.5
  text "2" at 23.52,29.75 h1.5
  text "4" at 26.077,29.75 h1.5
  text "10" at 53.9,29.75 h1.5
  text "GPO1" at 64,29.743 h3
  text "2" at 44.247,29.648 h1.5
  text "4" at 46.804,29.648 h1.5
  text "1" at 23.825,18.25 h1.5
  text "1" at 44.552,18.148 h1.5
  text "GPO2" at 64,17.178 h3
Top Solder:
  lines w3: 10,38.202 10,10 61.75,10 ; 10,58.877 10,60 110,60 110,10 77,10
Bottom Solder:
  lines w1.5: 10,38.278 10,58.471
  lines w3: 10,38.278 10,10 110,10 110,60 10,60 10,58.471
Mechanical 1:
  the board outline again, w0.01
Mechanical 15:
  the board outline again, w0.1
Board outline:
  the board outline again, w0.01

## Text inside footprints (layer, text, board x,y; h text height)
P4: Top Overlay "1" at 25,12 h1; Mechanical 13 "1" at 24.909,12.837 h1.27; Mechanical 13 "2" at 24.528,16.647 h1.27
P5: Top Overlay "1" at 46,12 h1; Mechanical 13 "1" at 45.784,12.987 h1.27; Mechanical 13 "2" at 45.403,16.797 h1.27